# Altium PCB PCB.PcbDoc (part 2 of 2)
Units mm, origin at the board's own origin, x right, y up, seen from the top; angles counter-clockwise.
Board outline 152.4 x 101.6 mm, 4 copper layers (Top Layer, Int1 (GND), Int2 (PWR), Bottom Layer), stack 0.726 mm thick; 112 components, 91 nets, 356 pads, 55 vias.
Unrouted connection lines stored in the file: 46.
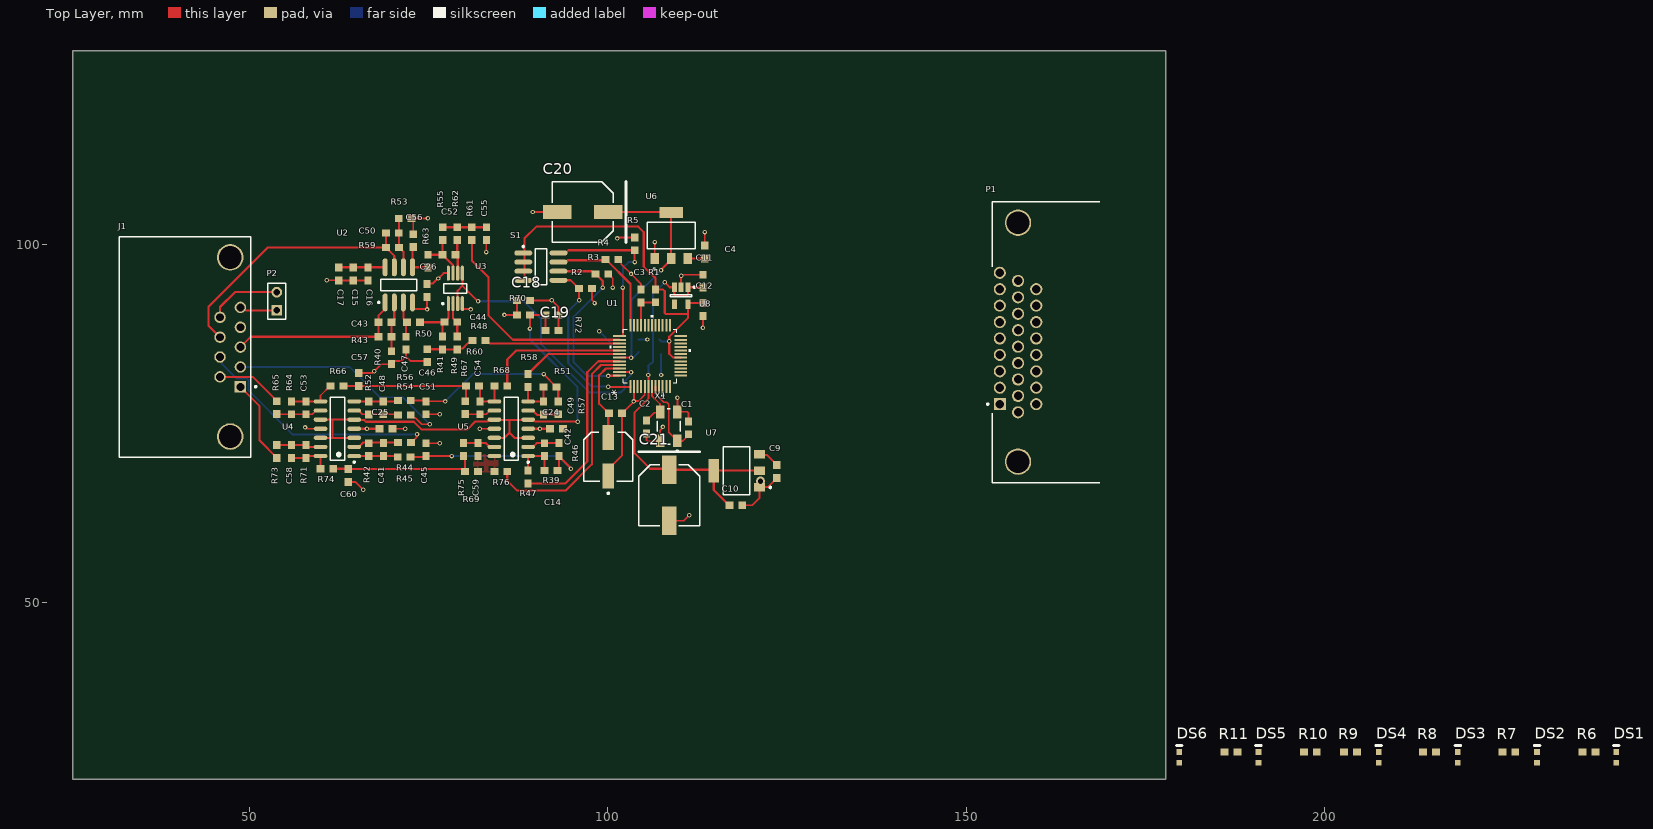
[diagram p0: Top Layer view]

## Via types
v1: diameter 0.62, hole 0.32, Top Layer to Bottom Layer, 54 vias
v2: diameter 1.27, hole 0.711, Top Layer to Bottom Layer, 1 vias

## Nets (pads, with @x,y where several pads share a name; then routed paths per layer and width w, separated by ;. In a path a pad name is that pad's centre, name@x,y a point inside that pad or via, vN(x,y) a via of type N, cw(c..) or ccw(c..) an arc to the next point about the centre after c; other vN are vias at no path point) (continued)
GND: (continued)
  Top Layer w0.254: v1(57.785,74.478) 57.884,74.478 58.067,74.295 U4.11 ; v1(60.833,94.996) 62.473,94.996 C17.1 C15.1 C16.1 ; C60.2 64.844,66.855 v1(65.913,65.786) ; C57.2 67.095,82.053 67.338,82.296 v1(67.437,82.296) 68.442,83.301 R40.2 69.85,83.351 70.223,83.724 71.232,83.724 71.882,84.374 ; C25.1 v1(71.755,74.295) ; C47.2 71.882,84.374 ; U2.4 72.771,91.208 72.977,91.002 74.733,91.002 v1(74.803,90.932) C26.1 C26.1@74.803,92.722 ; C56.1 72.882,103.405 R53.2 v1(74.93,103.632) ; C45.2 74.687,72.263 v1(76.581,72.263) ; C51.2 74.687,76.327 v1(76.581,76.327) ; C46.1 74.677,83.732 72.523,83.732 71.882,84.374 ; U3.4 79.726,91.081 79.816,90.99 80.841,90.99 v1(80.899,90.932) ; v1(82.169,74.295) U5.11 ; v1(83.058,98.933) 83.058,100.57 C55.1 ; C18.1 v1(92.202,92.202) 93.113,91.291 R72.1 C19.1 ; v1(89.535,104.521) C20.2 ; R2.1 97.79,93.842 97.79,92.301 98.168,91.923 v1(98.168,91.824) ; C14.1 100.076,68.641 101.981,70.546 C13.1 102.031,76.454 103.632,78.055 v1(103.632,78.105) v1@103.655,78.128 ; R3.1 100.126,95.885 100.499,95.512 100.499,95.462 100.711,95.25 v1(100.711,93.98) ; v1(101.346,100.838) 101.445,100.838 101.594,100.987 R5.1 ; R4.1 101.523,97.917 101.896,97.544 101.896,97.24 v1(103.251,95.885) 104.628,94.508 104.628,93.746 C3.1 ; U1.2 103.655,80.176 v1@103.655,78.128 ; U1.5 105.168,79.006 104.323,78.161 103.688,78.161 v1@103.655,78.128 ; C2.1 105.41,72.698 105.559,72.549 X1.4@107.131,72.549 ; U6.1 106.553,98.058 v1(106.553,100.33) ; X1.4 107.306,74.06 107.696,74.45 v1(107.696,74.549) ; C21.2 108.597,61.468 110.617,61.468 v1(111.379,62.23) ; X1.2@109.531,76.549 109.641,76.659 X1.2@109.728,76.659 ; X1.2 109.728,76.639 X1.2@109.728,76.659 ; v1(109.728,78.613) X1.2@109.728,76.659 ; U8.2 v1(110.236,95.631) 110.335,95.631 110.473,95.769 C11.1 ; C1.1 111.252,76.51 111.103,76.659 X1.2@109.728,76.659 ; v1(113.284,88.392) C12.1 ; C4.1 v1(113.538,101.727) ; C10.1 120.142,63.627 121.183,64.668 U7.1 ; v2(121.285,66.964) 121.183,66.862 U7.1 ; C9.1 123.571,67.376 122.348,66.153 U7.1
  Bottom Layer w0.254: v1(98.806,87.884) 100.573,86.117 C6.1 ; C5.1 104.289,86.741 v1(105.537,86.741) ; v1(107.442,81.788) C7.1 C8.1
KTY+: J1.5 P2.1 | length 5.3
  Top Layer w0.3: J1.5 49.12,91.217 49.532,90.805 P2.1
KTY-: J1.9 P2.2 | length 10.2
  Top Layer w0.3: J1.9 45.928,91.267 48.006,93.345 P2.2
LOT: DS5.2 P1.5 U1.34
NetC3_2: C3.2 R1.1 U1.33 | length 5.2
  Top Layer w0.29: U1.33 104.668,91.906 C3.2 106.669,91.926 R1.1
NetC13_2: C13.2 C14.2 U1.46 | length 12.9
  Top Layer w0.3: C13.2@99.949,76.454 99.949,76.581 C13.2@100.129,76.402 ; C14.2 100.076,76.349 C13.2@100.129,76.402 ; U1.46 99.759,82.705 98.806,81.752 98.806,77.779 100.131,76.454 C13.2 C13.2@100.129,76.402
NetC41_1: C41.1 R42.2 R45.1 U4.1 | length 6.1
  Top Layer w0.3: U4.1 C41.1 70.59,70.485 R45.1
NetC41_2: C41.2 R42.1 R44.2 U4.2 | length 6.4
  Top Layer w0.3: U4.2 65.294,71.755 65.929,72.39 R44.2
NetC42_1: C42.1 R39.2 R47.1 U5.1 | length 6.3
  Top Layer w0.3: R47.1 R47.1 U5.1 91.175,70.485 C42.1 91.186,68.464 R39.2
NetC42_2: C42.2 R46.2 U5.2 | length 4.5
  Top Layer w0.3: U5.2 89.552,71.755 90.082,72.285 R46.2
NetC43_1: C43.1 J1.3 R43.2 U2.1 | length 25
  Top Layer w0.3: J1.3 50.213,87.122 R43.2 C43.1 68.05,90.1 68.961,91.011 U2.1
NetC43_2: C43.2 R40.1 R43.1 U2.2 | length 7
  Top Layer w0.3: R40.1 R43.1 C43.2 69.881,89.154 70.231,89.504 U2.2
NetC44_1: C44.1 R41.2 R50.1 U3.1 | length 8.3
  Top Layer w0.3: R50.1 C44.1@77.197,89.154 ; R41.2 76.973,88.93 C44.1@77.197,89.154 ; U3.1 77.776,89.733 77.616,89.573 77.616,89.523 77.266,89.173 C44.1 C44.1@77.197,89.154
NetC44_2: C44.2 R49.2 U3.2 | length 4.9
  Top Layer w0.3: U3.2@78.381,91.792 U3.2 78.426,89.713 78.977,89.162 79.005,89.162 R49.2
NetC45_1: C45.1 R39.1 R45.2 R46.1 | length 27.5
  Top Layer w0.3: R45.2 74.56,70.358 74.687,70.485 v1(78.232,70.485) ; R39.1 93.218,68.696 R46.1@93.218,70.104 ; R46.1 R46.1@93.218,70.104 ; v1(94.869,68.707) 94.869,68.784 93.549,70.104 R46.1@93.218,70.104
  Bottom Layer w0.3: v1(78.232,70.485) 93.091,70.485 v1(94.869,68.707)
NetC46_2: C46.2 R41.1 R48.2 R49.1 | length 6.9
  Top Layer w0.3: C46.2 76.951,85.385 R41.1 R49.1 79.136,85.494 79.779,85.494 80.549,86.264 80.742,86.264 81.08,86.602 R48.2@81.08,86.676
NetC47_1: C47.1 R50.2 U2.3 | length 4.9
  Top Layer w0.3: U2.3 71.501,89.651 71.598,89.554 71.598,89.504 71.882,89.22 C47.1
NetC48_1: C48.1 R52.2 R56.1 U4.7 | length 6.1
  Top Layer w0.254: U4.7 R52.2 70.623,78.105 R56.1
NetC48_2: C48.2 R52.1 R54.2 U4.6 | length 6.3
  Top Layer w0.254: U4.6 65.264,76.835 65.794,76.305 R52.1 70.623,76.305 R54.2
NetC49_1: C49.1 R51.2 R58.1 U5.7 | length 6.2
  Top Layer w0.254: R58.1 R58.1 U5.7 C49.1 91.059,80.115 R51.2
NetC49_2: C49.2 R57.2 U5.6 | length 4.5
  Top Layer w0.3: U5.6 89.552,76.835 90.187,76.2 90.954,76.2 C49.2 93.08,76.305 R57.2
NetC50_1: C50.1 J1.8 R59.2 U2.7 | length 38.4
  Top Layer w0.3: J1.8 44.323,88.667 44.323,91.313 52.578,99.568 R59.2 ; C50.1 69.066,101.589 R59.2 ; U2.7 70.231,98.403 69.466,99.168 69.466,99.218 69.116,99.568 R59.2
NetC50_2: C50.2 R53.1 R59.1 U2.6 | length 7.1
  Top Layer w0.3: R53.1 70.866,103.621 R59.1 70.916,99.568 71.501,98.983 U2.6
NetC51_1: C51.1 R51.1 R56.2 R57.1 | length 24.8
  Top Layer w0.254: R56.2 74.581,78.211 C51.1 77.332,78.116 v1(77.343,78.105) ; v1(91.059,81.915) 91.059,81.865 92.787,80.137 R51.1
  Top Layer w0.3: R51.1 93.091,79.883 R57.1
  Bottom Layer w0.254: v1(77.343,78.105) 81.153,81.915 v1(91.059,81.915)
NetC52_1: C52.1 R55.2 R63.1 U3.7 | length 7.3
  Top Layer w0.3: R63.1 74.938,98.571 C52.1 ; R55.2 76.962,100.57 C52.1 ; U3.7 78.397,96.025 78.397,97.135 77.362,98.171 77.362,98.221 77.012,98.571 C52.1
NetC52_2: C52.2 R62.2 U3.6 | length 4.8
  Top Layer w0.3: R62.2 79.016,98.825 C52.2 79.076,98.257 U3.6
NetC53_1: C53.1 R64.2 R66.1 U4.8 | length 6.8
  Top Layer w0.254: R64.2 55.891,78.105 U4.8 59.944,78.928 61.28,80.264 R66.1
NetC53_2: C53.2 R64.1 R65.2 U4.9 | length 6.3
  Top Layer w0.254: R65.2 57.901,76.327 C53.2 58.793,76.316 59.312,76.835 U4.9
NetC54_1: C54.1 R60.2 R68.1 U5.8 | length 6.4
  Top Layer w0.254: R60.2 82.169,80.148 C54.1 82.18,78.105 U5.8 84.201,80.253 R68.1
NetC54_2: C54.2 R67.2 U5.9 | length 4.3
  Top Layer w0.254: R67.2 83.043,76.327 83.551,76.835 U5.9
NetC55_2: C55.2 R55.1 R61.2 R62.1 | length 6.1
  Top Layer w0.3: R55.1 R62.1 81.037,102.392 R61.2 83.069,102.403 C55.2
NetC56_2: C56.2 R63.2 U2.5 | length 5
  Top Layer w0.3: C56.2 72.771,99.507 U2.5 74.882,96.811 R63.2
NetC57_1: C57.1 R60.1 R66.2 R67.1 | length 19.3
  Top Layer w0.254: R66.2 65.267,80.264 C57.1 80.242,80.253 R60.1 80.253,78.243 R67.1
NetC58_1: C58.1 R71.2 R74.1 U4.14 | length 6
  Top Layer w0.3: C58.1 57.901,70.22 R71.2 58.166,70.485 U4.14 59.944,68.729 R74.1
NetC58_2: C58.2 R71.1 R73.2 U4.13 | length 6.2
  Top Layer w0.3: R73.2 57.89,72.009 R71.1 58.188,71.755 U4.13
NetC59_1: C59.1 R69.2 R76.1 U5.14
NetC59_2: C59.2 R75.2 U5.13 | length 4.5
  Top Layer w0.3: R75.2 C59.2 83.02,72.285 83.55,71.755 U5.13
NetC60_1: C60.1 R69.1 R74.2 R75.1 | length 20.8
  Top Layer w0.3: R74.2 63.765,68.707 C60.1 79.786,68.655 R69.1 80.115,70.253 R75.1
NetDS1_2: DS1.2 R6.1
NetDS2_2: DS2.2 R7.1
NetDS3_2: DS3.2 R8.1
NetDS4_2: DS4.2 R9.1
NetDS5_1: DS5.1 R10.1
NetDS6_1: DS6.1 R11.1
NetJ1_1: J1.1 R73.1 | length 12
  Top Layer w0.3: J1.1 51.458,77.447 51.458,72.649 53.848,70.259 R73.1
NetJ1_2: J1.2 R54.1 | length 32.9
  Top Layer w0.254: R54.1 72.901,75.827 73.144,75.827 74.041,74.93 v1(75.184,74.93)
  Bottom Layer w0.254: J1.2 64.021,82.907 68.234,78.694 71.42,78.694 v1(75.184,74.93)
NetJ1_6: J1.6 R65.1 | length 9.4
  Top Layer w0.3: J1.6 45.94,81.534 50.491,81.534 53.848,78.177 R65.1
NetJ1_7: J1.7 R44.1 | length 34.7
  Top Layer w0.254: R44.1 72.589,72.39 73.336,73.137 73.336,73.463 v1(73.406,73.533)
  Bottom Layer w0.254: J1.7 46.169,84.051 46.169,83.371 48.276,81.264 49.703,81.264 49.895,81.072 49.895,79.645 56.063,73.477 72.515,73.477 72.571,73.533 v1(73.406,73.533)
NM: DS3.1 P1.6 U1.31
RES0: R3.2 S1.6 U1.48 | length 26.9
  Top Layer w0.3: S1.6 97.718,96.266 R3.2@98.187,95.797 ; R3.2 98.326,95.885 99.314,94.897 v1(99.314,93.98) ; v1(100.076,81.661) 100.11,81.695 101.641,81.695 U1.48
  Bottom Layer w0.3: v1(99.314,93.98) 95.25,89.916 95.25,83.566 97.155,81.661 v1(100.076,81.661)
RES1: R2.2 S1.5 U1.1 | length 24.5
  Top Layer w0.3: S1.5 94.828,94.996 95.601,94.223 95.601,94.203 95.951,93.853 R2.2 96.012,93.842 v1(96.012,92.202) ; v1(100.076,80.137) 103.158,80.137 103.168,80.147 U1.1
  Bottom Layer w0.3: v1(96.012,92.202) 94.488,90.678 94.488,83.439 97.729,80.198 100.015,80.198 v1(100.076,80.137)
SIN: R68.2 U1.41 | length 19.9
  Top Layer w0.3: R68.2 85.99,83.958 87.237,85.205 U1.41
SINLO: R58.2 U1.42 | length 13.9
  Top Layer w0.3: R58.2 88.9,81.987 89.25,82.337 89.3,82.337 91.668,84.705 U1.42
VREF: C19.2 R70.1 R72.2 U4.3 U4.5 U4.10 U4.12 U5.3 U5.5 U5.10 U5.12 | length 74.1
  Top Layer w0.3: U4.12 61.595,73.025 ; U4.10 61.595,75.565 ; U4.3 61.595,73.025 ; U5.12@83.566,73.025 85.61,73.025 86.303,73.717 ; U5.3 86.995,73.025 86.303,73.717 ; v1(89.154,88.265) 89.154,90.159 R70.1 R72.2 C19.2 ; v1(95.801,75.27) 95.791,75.28 89.877,75.28 89.592,75.565 U5.5 88.844,75.508 86.303,75.508 ; 61.595,73.025 61.595,75.565 ; 61.595,75.565 65.375,75.565 65.433,75.508 66.031,75.508 66.275,75.263 72.946,75.263 74.041,74.168 80.391,74.168 81.534,75.311 83.225,75.311 83.479,75.565 U5.10 84.258,75.508 86.303,75.508 ; 86.303,73.717 86.303,75.508
  Bottom Layer w0.3: v1(89.154,88.265) 89.154,86.741 95.801,80.094 v1(95.801,75.27)
XTALOUT: C1.2 U1.8 X1.1 | length 11.1
  Top Layer w0.254: U1.8 106.671,80.186 106.671,79.14 107.833,77.978 108.219,77.978 108.506,77.69 108.506,73.817 X1.1 ; X1.1@109.706,72.549 110.424,72.549 110.879,73.004 110.879,73.149 C1.2
pads on no net: J1.4 P1.8 P1.9 P1.18 U8.4

## Polygon pours and split planes (outlines as drawn)
NetC59_1 on Top Layer "NETC59_1_L01_P000" (solid, pour order 0): 81.28,70.739 84.709,70.739 84.709,68.199 81.28,68.199
GND on Int1 (GND) (split plane): 177.29,25.91 25.91,25.91 25.91,126.49 177.29,126.49
+5VA on Int2 (PWR) (split plane): 177.29,25.91 25.91,25.91 25.91,126.49 177.29,126.49

## Text inside footprints (layer, text, board x,y; h text height)
P1: Mechanical 1 "Board Edge" at 170.434,80.649 h1.52 r90
U1: Top Overlay "*" at 101.727,78.867 h1.27 r90; Mechanical 13 "*" at 103.553,80.924 h1.27 r90